# Altium PCB Camera PCB.PcbDoc
Units mm, origin at the board's own origin, x right, y up, seen from the top; angles counter-clockwise.
Board outline 47 x 70.5 mm, 2 copper layers (Top Layer, Bottom Layer), stack 1.671 mm thick; 13 components, 67 nets, 82 pads, 35 vias.
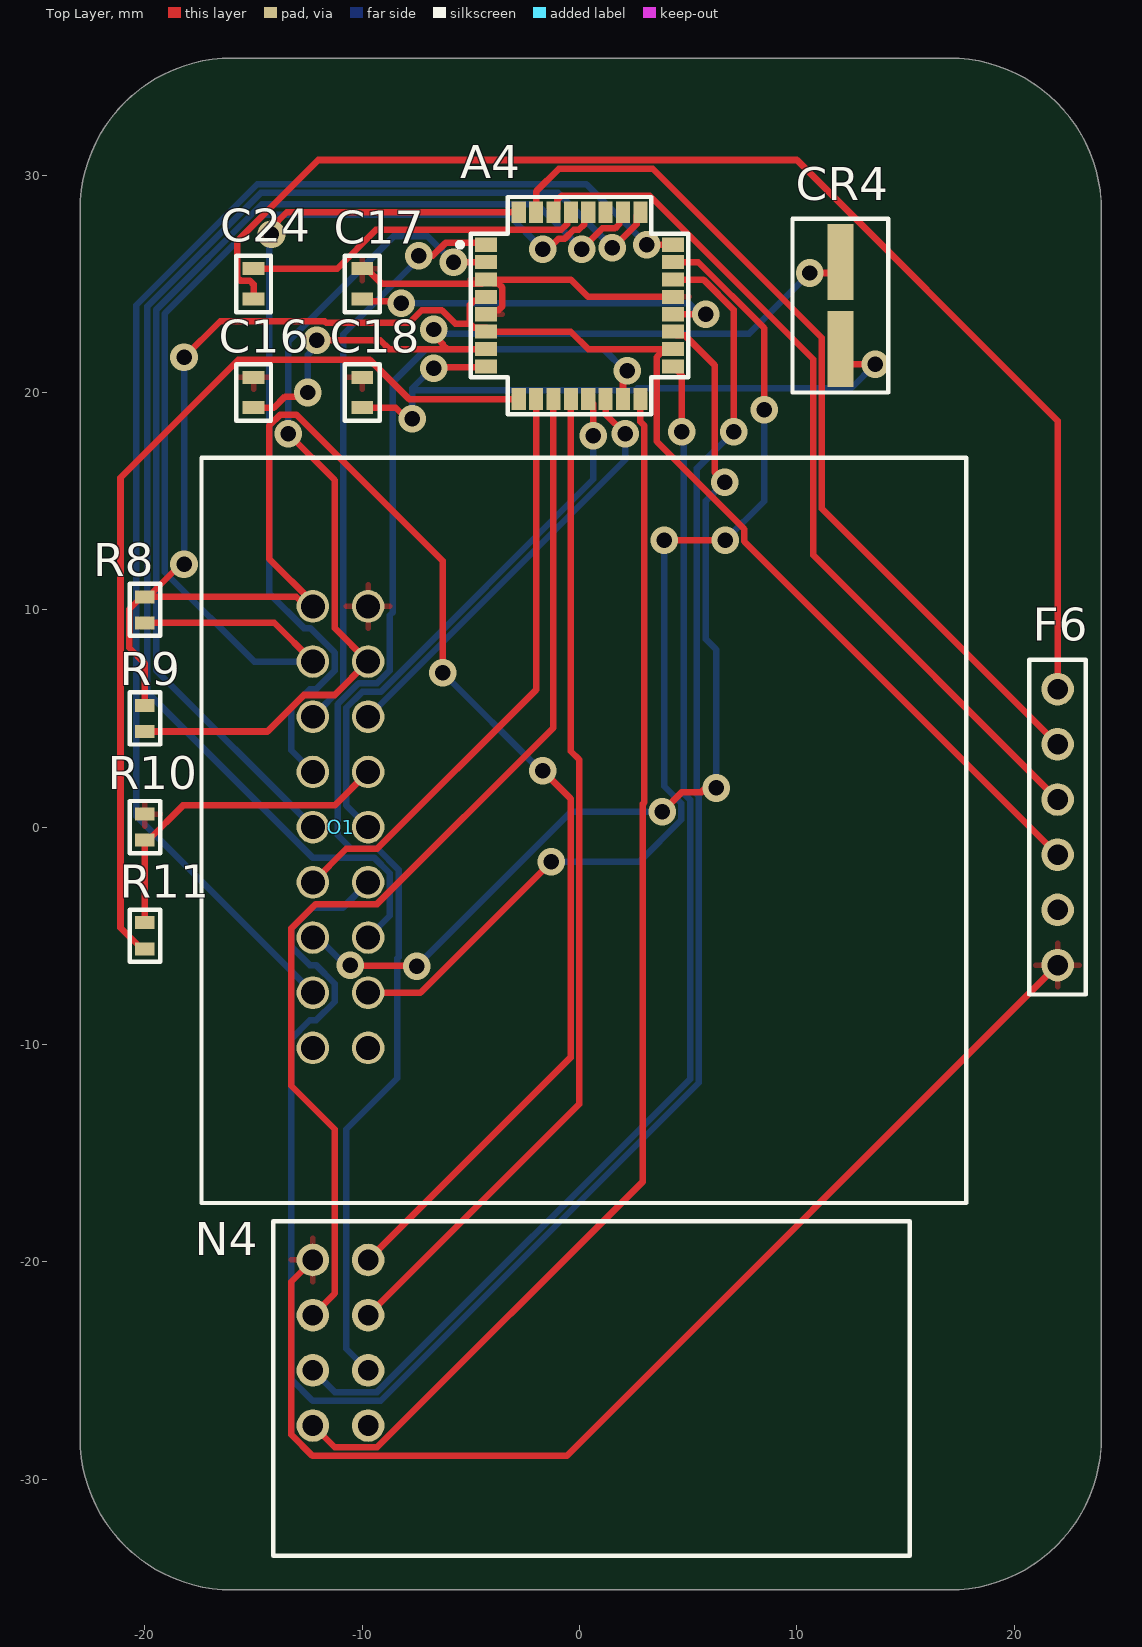
[diagram p0: Top Layer view]
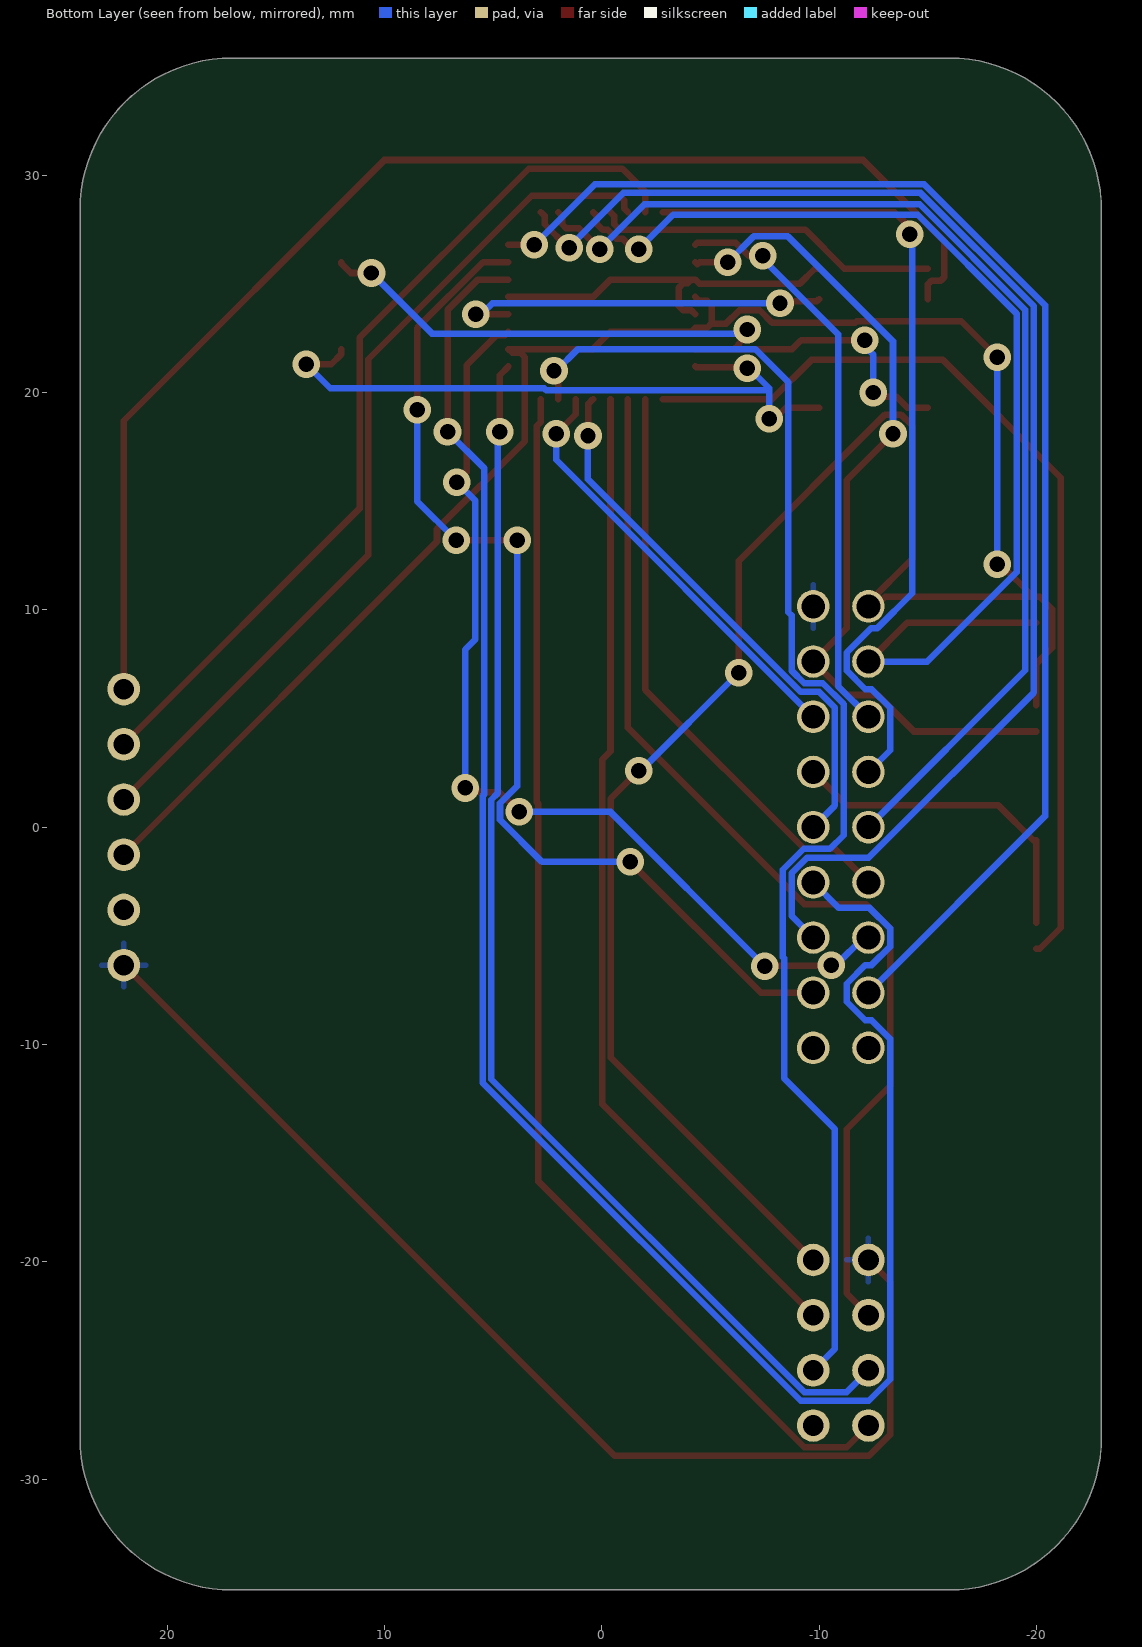
[diagram p1: Bottom Layer view, seen from below]
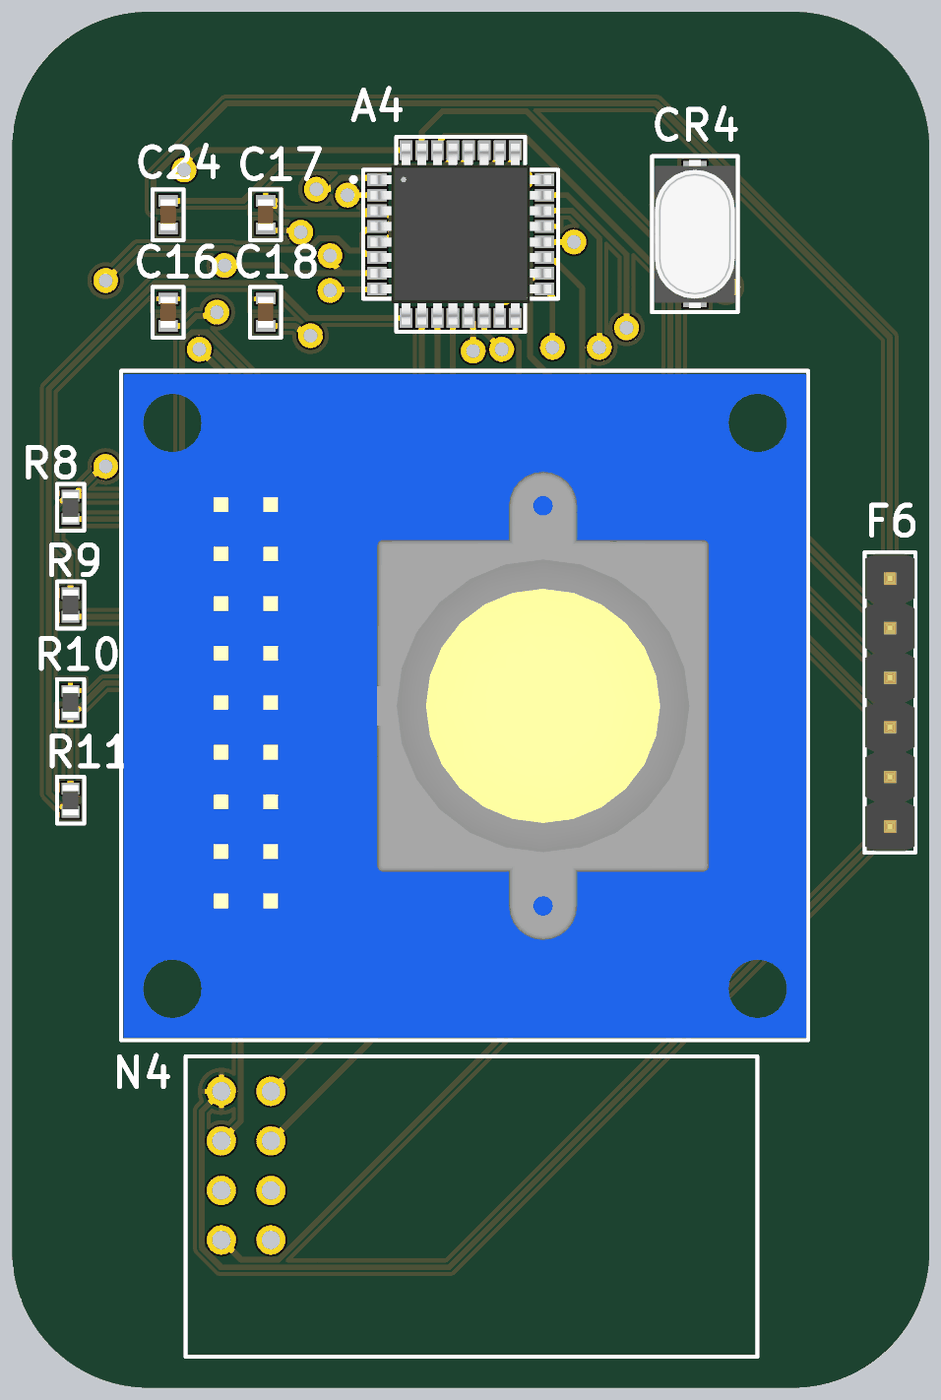
[diagram p2: 3D render of the assembled board from above, using the file's embedded part models]

## Layer stack, top to bottom
Top Solder: solder mask 0.0102, Solder Resist, Dk 3.5
Top Layer: signal copper 0.0356
Dielectric 1: dielectric 1.6, FR-4, Dk 4.8
Bottom Layer: signal copper 0.0356
Bottom Solder: solder mask 0.0102, Solder Resist, Dk 3.5

## Board outline
-22.987,-28.107 -22.987,28.393 cw(c-15.987,28.393) -15.987,35.393 17.013,35.393 cw(c17.013,28.393) 24.013,28.393 24.013,-28.107 cw(c17.013,-28.107) 17.013,-35.107 -15.987,-35.107 cw(c-15.987,-28.107)

## Design rules (kind name [scope] priority, off if disabled: settings)
Clearance [All] p1: gap=0.1 ignorepadtopadclearanceinfootprint=FALSE
Height [All] p1: minheight=0 maxheight=50 prefheight=12.7
HoleSize [All] p1: absolutevalues=TRUE maxlimit=2.54 minlimit=0 maxpercent=80.000 minpercent=20.000
HoleToHoleClearance [All] p1: gap=0.1 allowstackedmicrovias=TRUE
MinimumSolderMaskSliver [All] p1: minsoldermaskwidth=0.1
PolygonConnect [All] p1: connectstyle=Relief reliefconductorwidth=0.254 reliefentries=4 polygonreliefangle="90 Angle" airgapwidth=0.254
RoutingVias [All] p1: holewidth=0.3 width=0.6 viastyle="Through Hole" minholewidth=0.3 minwidth=0.6 maxholewidth=0.3 maxwidth=0.6
SilkToSilkClearance [All] p1: silktosilkclearance=0.1
SilkToSolderMaskClearance [IsPad] p1: minsilkscreentomaskgap=0 clearancetoexposedcopper=TRUE
SolderMaskExpansion [All] p1: expansion=0.102 istentingtop=FALSE
Width [All] p1: maxlimit=0.4 minlimit=0.1 preferedwidth=0.3
24 further rules are at their usual default settings.

## Components (designator, comment, footprint, x,y, rotation, side; value= is the part's Value field where it differs from the comment)
A4 "Atmega 328P" ATMega328P 0,24 r0 top
C16 "22pF" "22pF Capacitor" -15,20 r270 top
C17 "0.1uF" "0.1uF Capacitor" -10,25 r90 top
C18 "22pF" "22pF Capacitor" -10,20 r270 top
C24 "0.1uF" "0.1uF Capacitor" -15,25 r90 top
CR4 "16MHz Crystal" "16MHz Crystal" 12,24 r90 top
F6 "FTDI Breakout" FTDI 22,0 r0 top
N4 "NRF24L01" NRF24L01 -11,-23.73 r0 top
O1 "OV7670 Camera" "OV7670 Camera Module" -11,0 r0 top
R8 "10K" "10K Resistor" -20,10 r270 top
R9 "10K" "10K Resistor" -20,5 r270 top
R10 "4.7K" "4.7K Resistor" -20,0 r270 top
R11 "4.7K" "4.7K Resistor" -20,-5 r90 top

## Footprints (in the part's own frame and the unit in brackets; to place one, negate y for a bottom-side part, rotate by r counter-clockwise, add the part's x,y. Pads: shape width x height; smd on the part's side, far side on the other; paste and mask are expansions set on the pad)
"0.1uF Capacitor" [mm]
  rect 0.6x1 smd: 1(-0.7,0) 2(0.7,0)
  silkscreen extent -1.3,-0.8 1.3,0.8, body extent -0.8,-0.4 0.8,0.41, height 0.9
"4.7K Resistor" [mm]
  rect 0.6x0.9 smd: 1(-0.6,0) 2(0.6,0)
  silkscreen extent -1.2,-0.7 1.2,0.7, body extent -0.78,-0.4 0.78,0.4, height 0.54
"10K Resistor" [mm]
  rect 0.6x0.9 smd: 1(-0.6,0) 2(0.6,0)
  silkscreen extent -1.2,-0.7 1.2,0.7, body extent -0.78,-0.4 0.78,0.4, height 0.54
"16MHz Crystal" [mm]
  rect 3.5x1.2 smd: 1(-2,0) 2(2,0)
  silkscreen extent -4,-2.2 4,2.2, body extent -3.8,-2.05 3.8,2.05, height 2.31
"22pF Capacitor" [mm]
  rect 0.6x1 smd: 1(-0.7,0) 2(0.7,0)
  silkscreen extent -1.3,-0.8 1.3,0.8, body extent -0.8,-0.41 0.8,0.4, height 0.9
ATMega328P [mm]
  rect 1x0.65 smd: 1(-4.3,2.8) 2(-4.3,2) 3(-4.3,1.2) 4(-4.3,0.4) 5(-4.3,-0.4) 6(-4.3,-1.2) 7(-4.3,-2) 8(-4.3,-2.8) 17(4.3,-2.8) 18(4.3,-2) 19(4.3,-1.2) 20(4.3,-0.4) 21(4.3,0.4) 22(4.3,1.2) 23(4.3,2) 24(4.3,2.8)
  rect 0.65x1 smd: 9(-2.8,-4.3) 10(-2,-4.3) 11(-1.2,-4.3) 12(-0.4,-4.3) 13(0.4,-4.3) 14(1.2,-4.3) 15(2,-4.3) 16(2.8,-4.3) 25(2.8,4.3) 26(2,4.3) 27(1.2,4.3) 28(0.4,4.3) 29(-0.4,4.3) 30(-1.2,4.3) 31(-2,4.3) 32(-2.8,4.3)
  silkscreen extent -5.6,-5 5,5, body extent -4.62,-4.62 4.63,4.63, height 1.2
FTDI [mm]
  round 1.5 hole 0.95: 1(0,6.35) 2(0,3.81) 3(0,1.27) 4(0,-1.27) 5(0,-3.81) 6(0,-6.35)
  silkscreen extent -1.3,-7.7 1.3,7.7, body extent -1.27,-7.62 1.27,7.62, height 5.55
NRF24L01 [mm]
  round 1.5 hole 0.95: 1(-1.27,3.81) 2(-1.27,1.27) 3(-1.27,-1.27) 4(-1.27,-3.81) 5(1.27,3.81) 6(1.27,1.27) 7(1.27,-1.27) 8(1.27,-3.81)
  silkscreen extent -3.1,-9.8 26.2,5.6, body extent -2.91,-9.59 26.09,5.41, height 6.21
"OV7670 Camera Module" [mm]
  round 1.5 hole 1.1: 1(-1.27,10.16) 2(1.27,10.16) 3(-1.27,7.62) 4(1.27,7.62) 5(-1.27,5.08) 6(1.27,5.08) 7(-1.27,2.54) 8(1.27,2.54) 9(-1.27,0) 10(1.27,0) 11(-1.27,-2.54) 12(1.27,-2.54) 13(-1.27,-5.08) 14(1.27,-5.08) 15(-1.27,-7.62) 16(1.27,-7.62) 17(-1.27,-10.16) 18(1.27,-10.16)
  silkscreen extent -6.4,-17.3 28.8,17, body extent -6.28,-17.17 28.72,16.83, height 29.91

## Part data
A4: library part ATMEGA328PB-AUR, "IC MCU 8BIT 32KB FLASH 32TQFP", Case/Package=TQFP, Frequency=20MHz, Manufacturer=Microchip, Max Operating Temperature=85°C, Min Operating Temperature=-40°C, Supplier Part Number 1=ATMEGA328PB-AURCT-ND, Category=Microcontrollers, ComponentLink1Description=http://www.microchip.com/mymicrochip/filehandler.aspx?ddocname=en589666&src-supplier=Digi-Key, ComponentLink1URL=http://www.microchip.com/mymicrochip/filehandler.aspx?ddocname=en589666&src-supplier=Digi-Key, Core Architecture=AVR, Interface=I2C,SPI,UART,USART, Manufacturer Part Number=ATMEGA328PB-AUR, Memory Size=32KB, Memory Type=FLASH, Number of I/Os=27, Number of Pins=32, Oscillator Type=Internal, Packaging="Tape and Reel", Peripherals="Brown-out Detect/Reset,POR,PWM,WDT", Pricing 1="1=1.42000, 25=1.30000, 100=1.18000 (USD)", RoHS=No, Stock 1=9971, Supplier 1=Digi-Key
C16 C18: library part 06035A220JAT2A, "Cap Ceramic 22pF 50V C0G 5% SMD 0603 125C Paper T/R", Case Code (Imperial)=0603, Case Code (Metric)=1608, Dielectric=C0G, Dielectric Material=Ceramic, Insulation Resistance=100GR, Manufacturer="Kyocera AVX", Max Operating Temperature=125°C, Min Operating Temperature=-55°C, Package Quantity=1, Supplier Part Number 1=478-1167-1-ND, Temperature Coefficient=30ppm/°C, Tolerance=5%, Voltage=50V, Capacitance=22pF, Case/Package=0603, Category="Ceramic Capacitors", ComponentLink1Description=https://datasheet.ciiva.com/11788/0900766b802d4697-11788031.pdf?src-supplier=RSComponents, ComponentLink1URL=https://datasheet.ciiva.com/11788/0900766b802d4697-11788031.pdf?src-supplier=RSComponents, ComponentLink2Description=https://datasheet.ciiva.com/16351/ccog-16351125.pdf?src-supplier=Future+Electronics, ComponentLink2URL=https://datasheet.ciiva.com/16351/ccog-16351125.pdf?src-supplier=Future+Electronics, ComponentLink3Description=https://datasheet.ciiva.com/1124/759117-1124728.pdf?src-supplier=Element14, ComponentLink3URL=https://datasheet.ciiva.com/1124/759117-1124728.pdf?src-supplier=Element14, ComponentLink4Description=https://datasheet.ciiva.com/7855/759117-7855064.pdf?src-supplier=Element14, ComponentLink4URL=https://datasheet.ciiva.com/7855/759117-7855064.pdf?src-supplier=Element14, ComponentLink5Description=https://datasheet.ciiva.com/150/ccog-150366.pdf?src-supplier=Digi-Key, ComponentLink5URL=https://datasheet.ciiva.com/150/ccog-150366.pdf?src-supplier=Digi-Key, ComponentLink6Description=https://datasheet.ciiva.com/150/ccog-150367.pdf?src-supplier=Digi-Key, ComponentLink6URL=https://datasheet.ciiva.com/150/ccog-150367.pdf?src-supplier=Digi-Key, Contact Plating=Tin,Matte, Depth=0.81mm, Height=0.63mm, Lead Free="Lead Free", Length=1.6mm, Manufacturer Part Number=06035A220JAT2A, Mount="Surface Mount,PCB", Number of Pins=2, Packaging="Tape and Reel", Pricing 1="1=0.10000, 10=0.05600, 50=0.03040, 100=0.02480, 500=0.01772, 1000=0.01392 (USD)", Radiation Hardening=No, REACH SVHC="No SVHC", RoHS=Yes, Stock 1=678111, Supplier 1=Digi-Key, Termination=SMD/SMT, Thickness=0.035inch, Voltage Rating=50V, Voltage Rating (DC)=50V, Width=0.81mm
C17 C24: library part 06033C104KAT4A, "CAP CER 0.1UF 25V X7R 0603", Capacitance=100nF, Case Code (Imperial)=0603, Case Code (Metric)=1608, Dielectric=X7R, Manufacturer="Kyocera AVX", Max Operating Temperature=125°C, Min Operating Temperature=-55°C, Package Quantity=1, Supplier Part Number 1=478-7018-1-ND, Tolerance=10%, Voltage Rating=25V, Case/Package=0603, Category="Ceramic Capacitors", ComponentLink1Description=https://datasheet.ciiva.com/22619/1679506-22619862.pdf?src-supplier=Element14, ComponentLink1URL=https://datasheet.ciiva.com/22619/1679506-22619862.pdf?src-supplier=Element14, ComponentLink2Description=https://datasheet.ciiva.com/28613/1679506-28613035.pdf?src-supplier=Element14, ComponentLink2URL=https://datasheet.ciiva.com/28613/1679506-28613035.pdf?src-supplier=Element14, ComponentLink3Description=https://datasheet.ciiva.com/6277/cx7r-6277758.pdf?src-supplier=Digi-Key, ComponentLink3URL=https://datasheet.ciiva.com/6277/cx7r-6277758.pdf?src-supplier=Digi-Key, ComponentLink4Description=https://datasheet.ciiva.com/6277/cx7r-6277759.pdf?src-supplier=Digi-Key, ComponentLink4URL=https://datasheet.ciiva.com/6277/cx7r-6277759.pdf?src-supplier=Digi-Key, Depth=0.81mm, Height=0.9mm, Lead Free="Lead Free", Length=1.6mm, Manufacturer Part Number=06033C104KAT4A, Mount="Surface Mount", Number of Pins=2, Packaging="Tape and Reel", Pricing 1="1=0.10000, 10=0.04200, 50=0.02320, 100=0.01890, 500=0.01348, 1000=0.01059, 2500=0.00962, 5000=0.00886 (USD)", REACH SVHC="No SVHC", RoHS=Yes, Stock 1=6112957, Supplier 1=Digi-Key, Termination=SMD/SMT, Thickness=0.035inch, Voltage Rating (DC)=25V, Width=0.032inch
CR4: library part ECS-160-20-3X-TR, "CRYSTAL 16.0000MHZ 20PF SMD", ESR (Equivalent Series Resistance)=50R, Frequency=16MHz, Frequency Stability=50ppm, Frequency Tolerance=30ppm, Load Capacitance=20pF, Manufacturer="ECS International", Max Operating Temperature=70°C, Min Operating Temperature=-10°C, Package Quantity=1, Supplier Part Number 1=XC1776CT-ND, Category=Crystals, ComponentLink1Description=https://datasheet.ciiva.com/852/csm-3x-852328.pdf?src-supplier=Digi-Key, ComponentLink1URL=https://datasheet.ciiva.com/852/csm-3x-852328.pdf?src-supplier=Digi-Key, ComponentLink2Description=https://datasheet.ciiva.com/852/csm-3x-852329.pdf?src-supplier=Digi-Key, ComponentLink2URL=https://datasheet.ciiva.com/852/csm-3x-852329.pdf?src-supplier=Digi-Key, ComponentLink3Description=https://datasheet.ciiva.com/852/csm-3x-852330.pdf?src-supplier=Digi-Key, ComponentLink3URL=https://datasheet.ciiva.com/852/csm-3x-852330.pdf?src-supplier=Digi-Key, Height=0.091inch, Lead Free="Lead Free", Length=0.276inch, Manufacturer Part Number=ECS-160-20-3X-TR, Mount="Surface Mount", Packaging="Tape and Reel", Pricing 1="1=0.35000, 10=0.28800, 50=0.25880, 100=0.23000, 500=0.21850, 1000=0.18400 (USD)", RoHS=Yes, Stock 1=6685, Supplier 1=Digi-Key, Termination=SMD/SMT, Tolerance=30ppm, Width=0.161inch
F6: library part FTDI, "FTDI USB to TTL serial converter module"
N4: "3.3V NRF24L01 WIRELESS RF MODULE"
O1: library part "OV7670 Camera Module", "CMOS OV7670 Camera Module / 1/6-Inch 0.3-Megapixel Module"
R8 R9: library part RNCP0603FTD10K0, "RES 10K OHM 1% 1/8W 0603", Case Code (Imperial)=0603, Case Code (Metric)=1608, Manufacturer="Stackpole Electronics", Max Operating Temperature=155°C, Max Power Dissipation=125mW, Min Operating Temperature=-55°C, Resistance=10kR, Resistor Type="Thin Film", Supplier Part Number 1=RNCP0603FTD10K0CT-ND, Temperature Coefficient=100ppm/°C, Tolerance=1%, Case/Package=0603, Category="Chip SMD Resistors", ComponentLink1Description=https://www.seielect.com/Catalog/SEI-rncp.pdf?src-supplier=Avnet, ComponentLink1URL=https://www.seielect.com/Catalog/SEI-rncp.pdf?src-supplier=Avnet, ComponentLink2Description=https://www.seielect.com/catalog/SEI-Packaging.pdf?src-supplier=Digi-Key, ComponentLink2URL=https://www.seielect.com/catalog/SEI-Packaging.pdf?src-supplier=Digi-Key, ComponentLink3Description=https://www.seielect.com/Catalog/SEI-rncp.pdf?src-supplier=Digi-Key, ComponentLink3URL=https://www.seielect.com/Catalog/SEI-rncp.pdf?src-supplier=Digi-Key, Contact Plating=Tin,Matte, Features="Moisture Resistant,Anti-Sulfur", Height=0.02inch, Lead Free="Lead Free", Length=0.059inch, Manufacturer Part Number=RNCP0603FTD10K0, Mount="Surface Mount", Number of Terminations=2, Packaging="Tape and Reel", Pricing 1="1=0.10000, 10=0.05800, 100=0.02360, 1000=0.01060, 2500=0.00920 (USD)", Radiation Hardening=No, RoHS=Yes, Stock 1=180255, Supplier 1=Digi-Key, Width=0.031inch
R10 R11: library part RMCF0603FT4K70, "Res Thick Film 0603 4.7K Ohm 1% 1/10W 100ppm/C Molded SMD SMD Paper T/R", Case Code (Imperial)=0603, Case Code (Metric)=1608, Manufacturer="Stackpole Electronics", Max Operating Temperature=155°C, Max Power Dissipation=100mW, Min Operating Temperature=-55°C, Resistance=4.7kR, Resistor Type="Thick Film", Supplier Part Number 1=RMCF0603FT4K70CT-ND, Temperature Coefficient=100ppm/°C, Tolerance=1%, Case/Package=0603, Category="Chip SMD Resistors", ComponentLink1Description=https://datasheet.ciiva.com/26835/getdatasheetpartid-486078-26835642.pdf?src-supplier=Verical, ComponentLink1URL=https://datasheet.ciiva.com/26835/getdatasheetpartid-486078-26835642.pdf?src-supplier=Verical, Contact Plating=Tin,Matte, Depth=0.8mm, Features="Automotive AEC-Q200", Height=0.022inch, Lead Free="Lead Free", Length=1.55mm, Manufacturer Part Number=RMCF0603FT4K70, Military Standard=Not, Mount="Surface Mount", Number of Terminations=2, Packaging="Tape and Reel", Power Rating=100mW, Pricing 1="1=0.10000, 10=0.01500, 100=0.00590, 1000=0.00265, 2500=0.00230 (USD)", Radiation Hardening=No, RoHS=Yes, Stock 1=603007, Supplier 1=Digi-Key, Width=0.031inch

## Via types
v1: diameter 1.27, hole 0.711, Top Layer to Bottom Layer, 35 vias

## Nets (pads, with @x,y where several pads share a name; then routed paths per layer and width w, separated by ;. In a path a pad name is that pad's centre, name@x,y a point inside that pad or via, vN(x,y) a via of type N, cw(c..) or ccw(c..) an arc to the next point about the centre after c; other vN are vias at no path point)
2K: 
3.7V: 
100: 
+3V3: A4.4 A4.6 A4.18 F6.4 N4.5 O1.1 R8.1 R9.1 | length 141.4
  Top Layer w0.3: R9.1 -20,7.526 -20.724,8.25 -20.724,10.026 -20.15,10.6 R8.1@-19.85,10.6 ; v1(-18.2,12.1) -18.35,12.1 R8.1@-19.85,10.6 ; v1(-18.2,21.624) -16.539,23.285 -11.733,23.285 -11.663,23.215 -7.833,23.215 -7.263,23.785 -6.333,23.785 -5.72,23.171 -5.05,23.171 ; N4.5 -0.415,-10.605 -0.415,1.315 v1(-1.7,2.6) ; v1(-6.3,7.1) -6.3,12.252 -13.033,18.985 -13.767,18.985 -14.285,18.467 -14.285,12.348 -12.27,10.333 O1.1 -12.595,10.16 -13.035,10.6 R8.1@-19.85,10.6 ; A4.4 -4.475,24.225 -4.854,24.225 -5.05,24.029 -5.05,23.171 ; F6.4 7.585,13.145 7.585,13.715 3.55,17.75 3.55,21.629 3.746,21.825 4.125,21.825 A4.18 0.4,22 -0.4,22.8 -4.125,22.8 -4.3,22.975 -4.854,22.975 -5.05,23.171
  Bottom Layer w0.3: v1(-18.2,12.1) v1(-18.2,21.624) ; v1(-6.3,7.1) -1.8,2.6 v1(-1.7,2.6)
ADC6: A4.19 O1.13 | length 45.3
  Top Layer w0.3: v1(-10.56,-6.35) -10.5,-6.35 -10.475,-6.375 -7.525,-6.375 v1(-7.5,-6.4) ; v1(3.8,0.7) 4.715,1.615 5.615,1.615 5.8,1.8 6.287,1.8 v1(6.288,1.801) ; A4.19 4.475,22.625 4.854,22.625 6.215,21.264 6.215,16.337 v1(6.676,15.876)
  Bottom Layer w0.3: O1.13 -12.05,-5.08 -10.78,-6.35 v1(-10.56,-6.35) ; v1(-7.5,-6.4) -0.4,0.7 v1(3.8,0.7) ; v1(6.288,1.801) 6.288,8.172 5.815,8.645 5.815,15.015 v1(6.676,15.876)
ADC7: A4.22 O1.12 | length 92.1
  Top Layer w0.3: A4.22 5.7,25.2 7.1,23.8 v1(7.1,18.2)
  Bottom Layer w0.3: O1.12 -10.908,-3.718 -12.322,-3.718 -13.27,-4.666 -13.27,-5.494 -12.414,-6.35 -12.126,-6.35 -11.27,-7.206 -11.27,-8.034 -12.126,-8.89 -12.414,-8.89 -13.27,-9.746 -13.27,-25.414 -12.284,-26.4 -9.15,-26.4 5.485,-11.765 5.485,1.429 5.403,1.511 5.403,16.503 v1(7.1,18.2)
C5: 
C12: 
C21: 
C24: A4.29 C24.2 | length 15.9
  Top Layer w0.3: C24.2 -11.154,25.7 -9.369,27.485 -0.836,27.485 -0.575,27.746 -0.575,28.125 A4.29
CE: 
GND: A4.3 A4.5 A4.21 C16.1 C17.2 C18.1 F6.6 N4.1 O1.2 R10.1 | length 71
  Top Layer w0.3: N4.1 -13.27,-20.92 -13.27,-27.954 -12.284,-28.94 -0.59,-28.94 F6.6 ; C17.2 -9.8,25.7 -9.115,25.015 -4.485,25.015 A4.3 A4.3@-4.125,25.2 ; A4.5 -4.125,23.775 -3.746,23.775 -3.55,23.971 -3.55,24.829 -3.746,25.025 -3.95,25.025 A4.3@-4.125,25.2 ; A4.21 0.4,24.4 -0.4,25.2 A4.3@-4.125,25.2
NetA1_98: 
NetA2_20: 
NetA3_20: 
NetA4_20: A4.20 C17.1 | length 17.6
  Top Layer w0.3: C17.1 -9.9,24.2 -8.3,24.2 v1(-8.2,24.1) ; A4.20 v1(5.8,23.6)
  Bottom Layer w0.3: v1(-8.2,24.1) 5.038,24.1 5.538,23.6 v1(5.8,23.6)
NetA5_20: 
NetC2_2: 
NetC12_1: 
NetC15_1: 
NetC21_1: 
NetC24_1: C24.1 F6.1 | length 59.8
  Top Layer w0.3: C24.1 -15,24.974 -15.176,25.15 -15.604,25.15 -15.75,25.296 -15.75,26.97 -12.02,30.7 10.004,30.7 22,18.704 F6.1
NetC26_1: 
NetF2_2: 
NetG1_1: 
NetG1_2: 
NetO1_8: O1.8 R10.2 R11.2 | length 15.4
  Top Layer w0.3: R11.2 R10.2 -19.85,-0.6 -18.25,1 -11.27,1 O1.8
NetQ1_1: 
NetQ2_1: 
NetR4_2: 
NetR5_1: 
NetR5_2: 
OC: 
OD: 
PB0: A4.12 N4.6 | length 46.3
  Top Layer w0.3: N4.6 -0.015,-12.745 -0.015,3.11 -0.4,3.495 A4.12
PB1: A4.13 O1.10 | length 25.4
  Top Layer w0.3: A4.13 0.625,19.475 0.625,18.023 v1(0.637,18.012)
  Bottom Layer w0.3: O1.10 -10.73,1 -10.73,5.494 -10.004,6.22 -9.15,6.22 0.637,16.007 v1(0.637,18.012)
PB2: A4.14 O1.6 | length 19.9
  Top Layer w0.3: A4.14 1.2,19 v1(2.1,18.1)
  Bottom Layer w0.3: O1.6 -9.724,5.08 2.1,16.904 v1(2.1,18.1)
PB3: A4.15 N4.7 | length 63.5
  Top Layer w0.3: A4.15 v1@2,21.1
  Bottom Layer w0.3: N4.7 -10.73,-24 -10.73,-13.901 -8.385,-11.556 -8.385,-6.033 -8.33,-5.978 -8.33,-1.96 -9.29,-1 -10.5,-1 -11.13,-0.37 -11.13,5.66 -10.17,6.62 -9.316,6.62 -8.73,7.206 -8.73,9.746 -8.585,9.891 -8.585,20.482 -7.067,22 1.1,22 2.1,21 v1(2.2,21)
PB4: A4.16 N4.4 | length 56.8
  Top Layer w0.3: N4.4 -11.27,-28.54 -9.316,-28.54 2.915,-16.309 2.915,1.067 2.985,1.137 2.985,18.467 2.8,18.652 A4.16
PB5: A4.17 N4.3 | length 57.3
  Top Layer w0.3: v1@4.3,18.2 v1(4.7,18.2) 4.7,20.8 A4.17
  Bottom Layer w0.3: N4.3 -11.27,-26 -9.316,-26 5.085,-11.599 5.085,1.263 4.8,1.548 4.8,18.1 v1(4.7,18.2)
PB6: A4.7 C16.2 CR4.2 | length 34.7
  Top Layer w0.3: C16.2 -14.066,19.3 -13.551,19.814 -12.686,19.814 v1(-12.5,20) ; v1(-12.1,22.4) -9.169,22.4 -8.769,22 -6.1,22 ; v1(-6.7,22.9) -6.7,22.638 -6.302,22.24 -6.302,22.202 -6.1,22 ; A4.7 -6.1,22 ; v1(10.6,25.5) 10.7,25.6 10.8,25.5 11.55,25.5 12,25.95 CR4.2
  Bottom Layer w0.3: v1(-12.5,20) -12.5,21.738 -12.1,22.138 v1(-12.1,22.4) ; v1(-6.7,22.9) -6.515,22.715 7.815,22.715 v1(10.6,25.5)
PB7: A4.8 C18.2 CR4.1 | length 31.6
  Top Layer w0.3: C18.2 -8.462,19.3 -7.962,18.8 v1(-7.7,18.8) ; v1(-6.7,21.115) -6.658,21.158 -4.343,21.158 A4.8 ; CR4.1 12,21.75 12.45,21.3 v1(13.6,21.3)
  Bottom Layer w0.3: v1(-7.7,18.8) -7.7,20.2 ; v1(-6.7,21.115) -6.785,21.115 -7.7,20.2 ; v1(13.6,21.3) 12.5,20.2 2.652,20.2 2.567,20.115 -7.615,20.115 -7.7,20.2
PC0: A4.23 O1.16 | length 49.7
  Top Layer w0.3: O1.16 -7.32,-7.62 v1(-1.3,-1.6) ; v1(3.9,13.2) v1(6.7,13.2) ; A4.23 5.466,26 8.5,22.966 v1(8.5,19.2)
  Bottom Layer w0.3: v1(-1.3,-1.6) 2.752,-1.6 4.685,0.333 4.685,1.098 3.9,1.883 v1(3.9,13.2) ; v1(6.7,13.2) 8.5,15 v1(8.5,19.2)
PC1: A4.24 O1.15 | length 63.2
  Top Layer w0.3: v1(3.1,26.8) A4.24
  Bottom Layer w0.3: O1.15 -20.4,0.51 -20.4,24.017 -14.832,29.585 0.315,29.585 v1(3.1,26.8)
PC2: A4.25 O1.14 | length 62.5
  Top Layer w0.3: v1(1.5,26.665) 1.535,26.7 1.579,26.7 2.625,27.746 2.625,28.125 A4.25
  Bottom Layer w0.3: O1.14 -8.73,-4.08 -8.73,-2.126 -9.456,-1.4 -12.284,-1.4 -19.885,6.201 -19.885,23.967 -14.667,29.185 -0.985,29.185 1.5,26.7 v1(1.5,26.665)
PC3: A4.26 O1.9 | length 52.1
  Top Layer w0.3: v1(0.1,26.6) 1.05,27.55 1.629,27.55 1.825,27.746 1.825,28.125 A4.26
  Bottom Layer w0.3: O1.9 -19.485,7.215 -19.485,23.801 -14.626,28.66 -1.96,28.66 v1(0.1,26.6)
PC5: A4.28 O1.3 R8.2 | length 51.8
  Top Layer w0.3: R8.2 -14.05,9.4 O1.3 ; v1(-1.7,26.6) -1.438,26.6 -0.953,27.085 -0.671,27.085 -0.271,27.485 -0.036,27.485 0.225,27.746 0.225,28.125 A4.28
  Bottom Layer w0.3: O1.3 -14.972,7.62 -19.085,11.733 -19.085,23.635 -14.543,28.177 -3.277,28.177 v1(-1.7,26.6)
PD0: A4.30 F6.3 | length 40.5
  Top Layer w0.3: A4.30 -1.025,28.475 -1.025,28.854 -0.829,29.05 3.229,29.05 10.75,21.529 10.75,12.52 F6.3
PD1: A4.31 F6.2 | length 41
  Top Layer w0.3: A4.31 -2,29.25 -0.95,30.3 3.366,30.3 11.15,22.516 11.15,14.66 F6.2
PD2: A4.32 O1.7 | length 39.6
  Top Layer w0.3: v1(-14.177,27.292) -14.204,27.319 -14.204,27.568 -13.472,28.3 A4.32
  Bottom Layer w0.3: v1(-14.177,27.292) -14.285,27.184 -14.285,10.761 -12.684,9.16 -12.396,9.16 -11.27,8.034 -11.27,7.206 -12.126,6.35 -12.414,6.35 -13.27,5.494 -13.27,3.54 O1.7
PD3: A4.1 O1.5 | length 26.6
  Top Layer w0.3: v1(-7.4,26.3) -6.752,26.3 -6.167,26.885 -4.385,26.885 A4.1
  Bottom Layer w0.3: O1.5 -12.27,5.086 -10.87,6.486 -10.87,22.682 -7.4,26.152 v1(-7.4,26.3)
PD4: A4.2 O1.4 R9.2 | length 39.5
  Top Layer w0.3: R9.2 -14.364,4.4 -12.684,6.08 -11.27,6.08 O1.4 -11.27,9.16 -11.27,15.97 v1(-13.4,18.1) ; v1(-5.8,26) -4.5,26 -4.4,25.9 A4.2
  Bottom Layer w0.3: v1(-13.4,18.1) -13.4,22.352 -8.567,27.185 -6.985,27.185 v1(-5.8,26)
PD5: A4.9 R11.1 | length 43.5
  Top Layer w0.3: R11.1 -20.15,-5.6 -21.124,-4.626 -21.124,16.076 -15.7,21.5 -9.646,21.5 -7.846,19.7 A4.9
PD6: A4.10 O1.11 | length 27.3
  Top Layer w0.3: O1.11 -10.73,-1 -9.316,-1 -2,6.316 A4.10
PD7: A4.11 N4.2 | length 50.1
  Top Layer w0.3: N4.2 -11.27,-21.46 -11.27,-13.901 -13.27,-11.901 -13.27,-4.666 -12.144,-3.54 -9.316,-3.54 -1.2,4.576 A4.11
PE0: 
PE1: 
PE4: 
PE5: 
PF0: 
PH4: 
PH5: 
RS: 
S2: 
SW: 
XTAL1: 
XTAL2: 
pads on no net: A4.27 F6.5 N4.8 O1.17 O1.18

## Polygon pours and split planes (outlines as drawn)
GND on Top Layer "NONET_L-01_P-001" (none, remove dead copper, pour order 0): -23,38.2 33.7,38.2 33.7,-44.4 33.1,-45 -23,-45
GND on Bottom Layer "NONET_L-01_P-001" (none, remove dead copper, pour order 1): -23,38.2 29.6,38.2 31,36.8 31,-45 -23,-45

## Silkscreen, mask and mechanical layers (free items; w line width, h text height)
Board Outline:
  circle w0.006: c0.513,0.143 r0.003
  lines w0.013: -22.987,-28.107 ccw(c-15.987,-28.107) -15.987,-35.107 17.013,-35.107 ccw(c17.013,-28.107) 24.013,-28.107 24.013,28.393 ccw(c17.013,28.393) 17.013,35.393 -15.987,35.393 ccw(c-15.987,28.393) -22.987,28.393 -22.987,-28.107